# EAGLE board EA2-5TNFG (EAGLE 6.5.0)
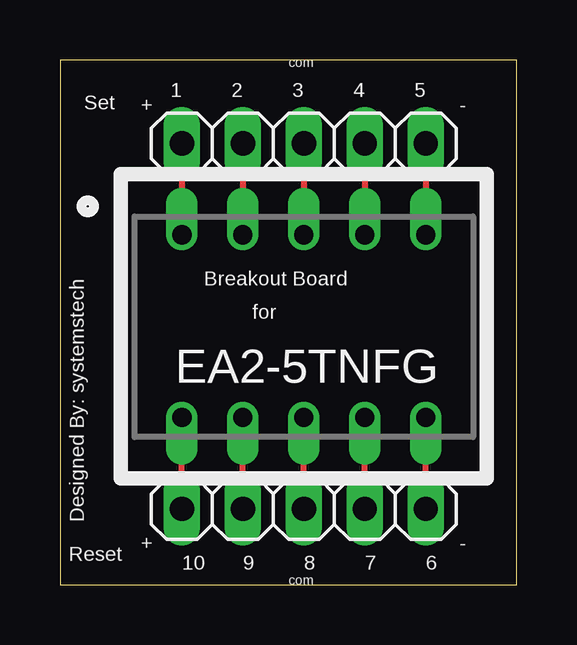
[diagram p0: board, top side]
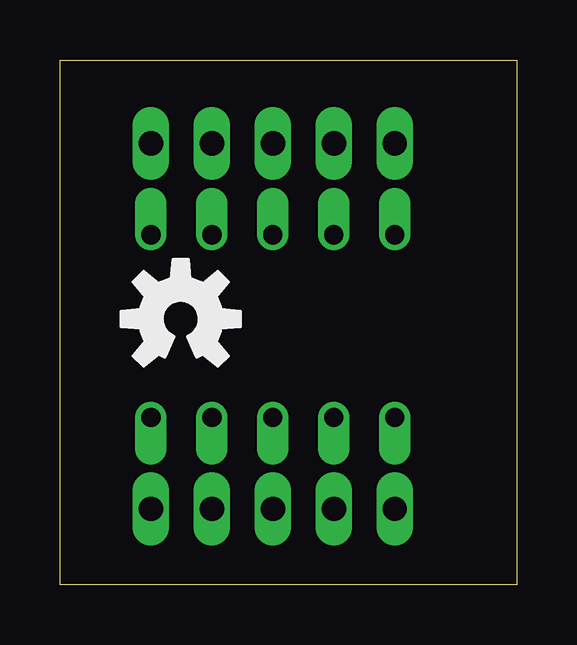
[diagram p1: board, bottom side, seen from below]

Size 19.03 x 21.89 mm. Coordinates in mm from the lower left corner, seen from the top.
Outline: 0,0 19.03,0 19.03,21.89 0,21.89 0,0
Copper layers (1*16): Top 0.035mm / dielectric 1.5mm / Bottom 0.035mm
Design rules "default": minimum track width 10mil, minimum drill 0.6mm, track to track 8mil, track to pad 8mil, pad to pad 8mil, via to via 8mil, smd to smd 8mil, copper to edge 40mil, drill to drill 8mil, minimum pad ring 10mil, minimum via ring 8mil, stop-mask expansion 4mil, vias tented up to drill 0mil, thermal gap 10mil

## Footprints (pad centres in the part's own frame; a part is rotated, then mirrored left to right if it is on the bottom)
1X05 = drill 1.016 long: 1 -5.08,0; 2 -2.54,0; 3 0,0; 4 2.54,0; 5 5.08,0
EA2-SERIES-RELAY = drill 0.8 offset: P$1 -5.08,3.81; P$2 -2.54,3.81; P$3 0,3.81; P$4 2.54,3.81; P$5 5.08,3.81; P$6 5.08,-3.81; P$7 2.54,-3.81; P$8 0,-3.81; P$9 -2.54,-3.81; P$10 -5.08,-3.81

## Placement (x,y rotation side)
FRAME1  FRAME-LETTER  [CREATIVE_COMMONS]  24.13,-10.16 0 top  (outside the outline)
JP3  [1X05]  10.16,18.41 0 top
JP4  [1X05]  10.16,3.17 180 top
U$1  EA2-5TNFG  [EA2-SERIES-RELAY]  10.16,10.79 0 top
U$2  [OSHW-LOGO-M]  14,11.1 0 bottom

## Library data of the parts
FRAME1 U$2 = SparkFun-Aesthetics
JP3 JP4 = pinhead
U$1 = railman

## Nets
N$1: JP4.5 U$1.P$10
N$2: JP4.4 U$1.P$9
N$3: JP4.3 U$1.P$8
N$4: JP4.2 U$1.P$7
N$5: JP4.1 U$1.P$6
N$6: JP3.5 U$1.P$5
N$7: JP3.4 U$1.P$4
N$8: JP3.3 U$1.P$3
N$9: JP3.2 U$1.P$2
N$10: JP3.1 U$1.P$1

## Tracks (layer width: path | path; a pad name or v marks a point on that pad's centre or on a via)
N$1
  Top 0.254: JP4.5 U$1.P$10
N$2
  Top 0.254: JP4.4 U$1.P$9
N$3
  Top 0.254: JP4.3 U$1.P$8
N$4
  Top 0.254: JP4.2 U$1.P$7
N$5
  Top 0.254: JP4.1 U$1.P$6
N$6
  Top 0.254: JP3.5 U$1.P$5
N$7
  Top 0.254: JP3.4 U$1.P$4
N$8
  Top 0.254: JP3.3 U$1.P$3
N$9
  Top 0.254: JP3.2 U$1.P$2
N$10
  Top 0.254: JP3.1 U$1.P$1

## Text on the board
_tsilk: com | 1 | 2 | 3 | 4 | 5 | Set | + | - | Breakout Board | for | Designed By: systemstech | Reset | + | 10 | 9 | 8 | 7 | 6 | - | com